# Altium PCB Limit_Switch_RGB_Vertical_v1.0.PcbDoc
Units mm, origin at the board's own origin, x right, y up, seen from the top; angles counter-clockwise.
Board outline 30 x 20.5 mm, 2 copper layers (Top Layer, Bottom Layer), stack 1.569 mm thick; 13 components, 12 nets, 35 pads, 8 vias.
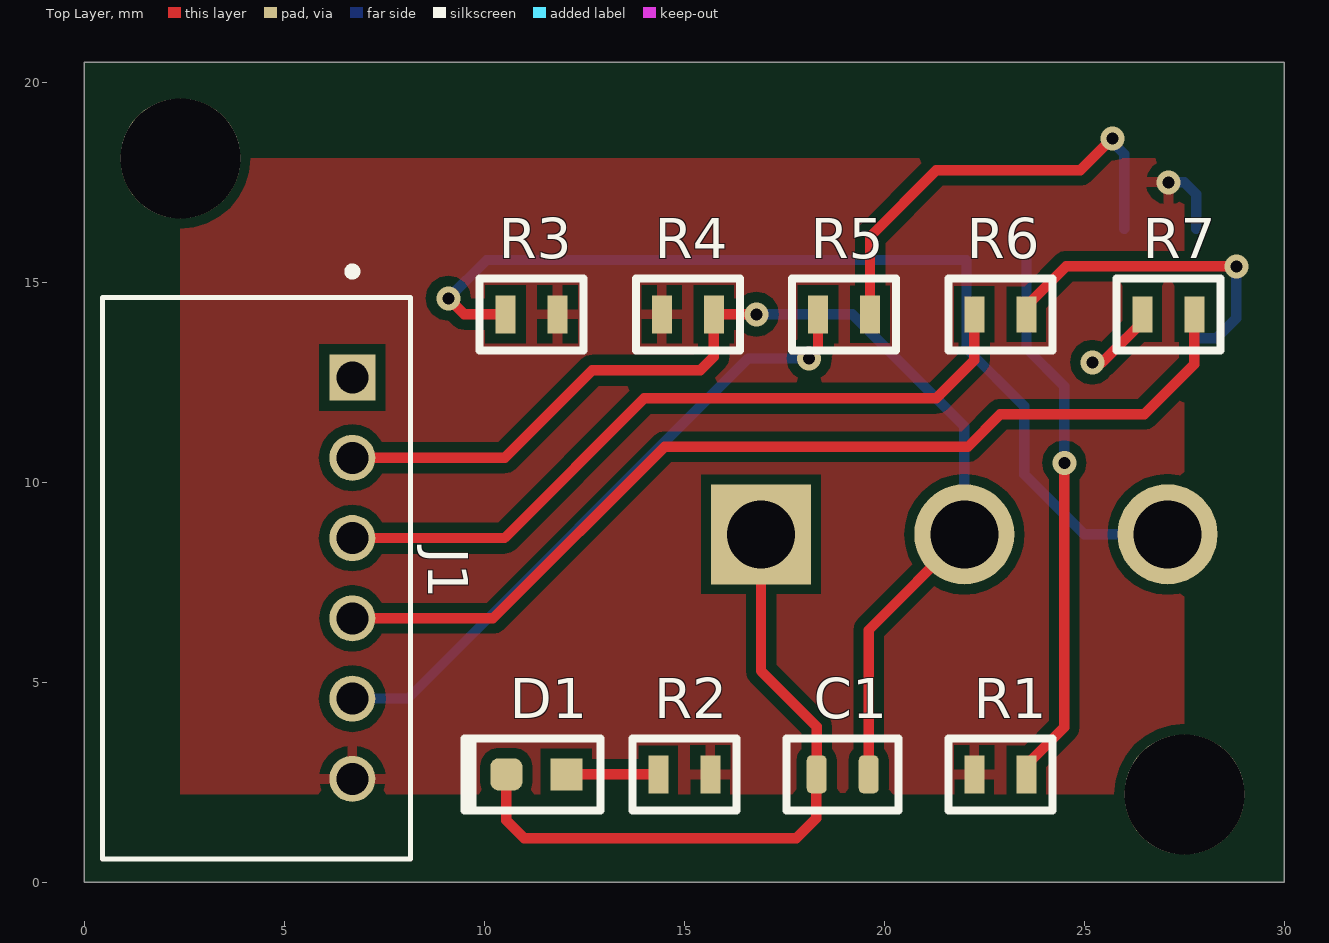
[diagram p0: Top Layer view]
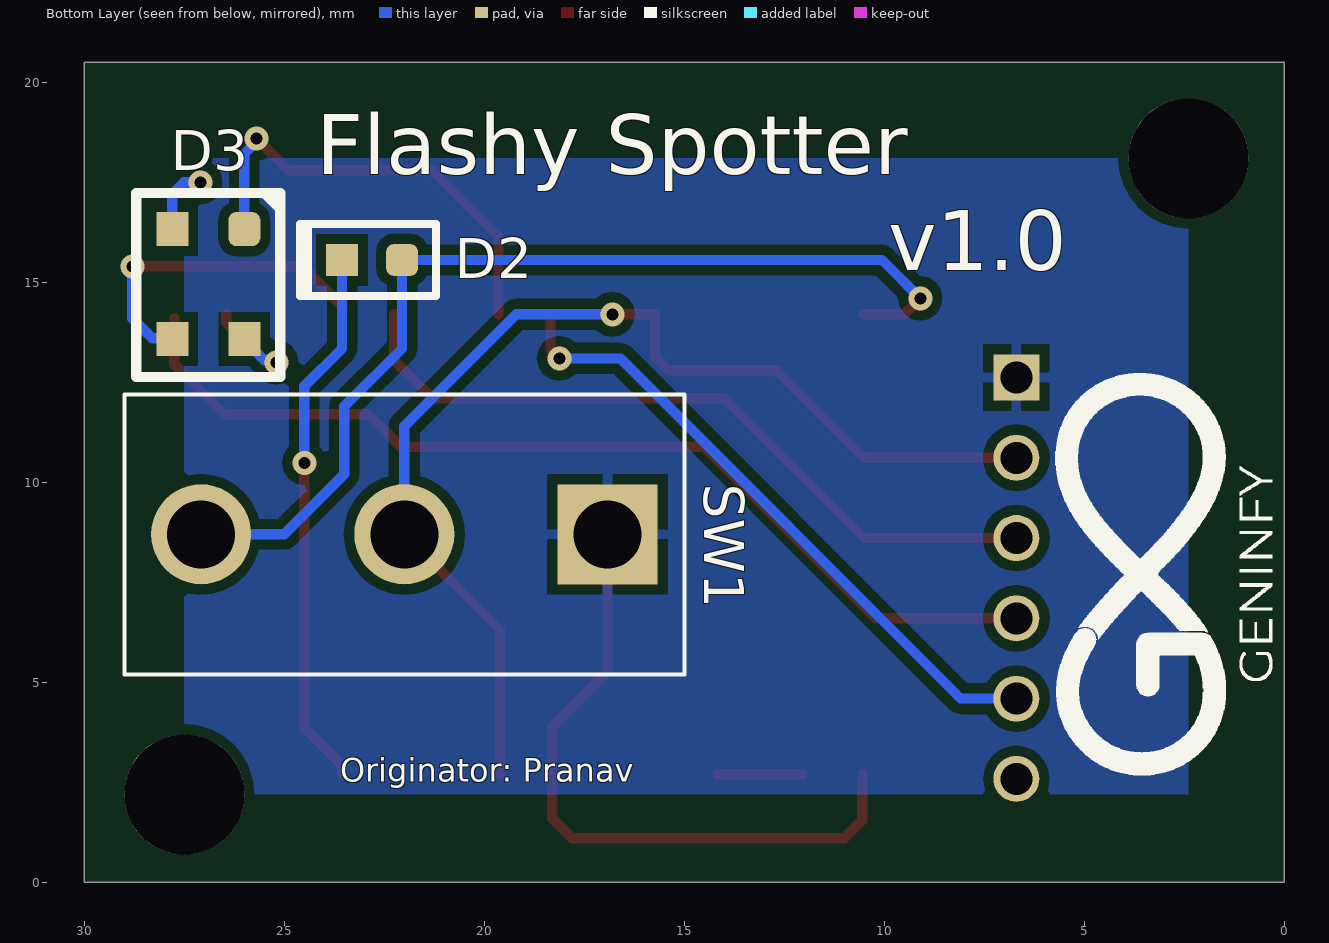
[diagram p1: Bottom Layer view, seen from below]
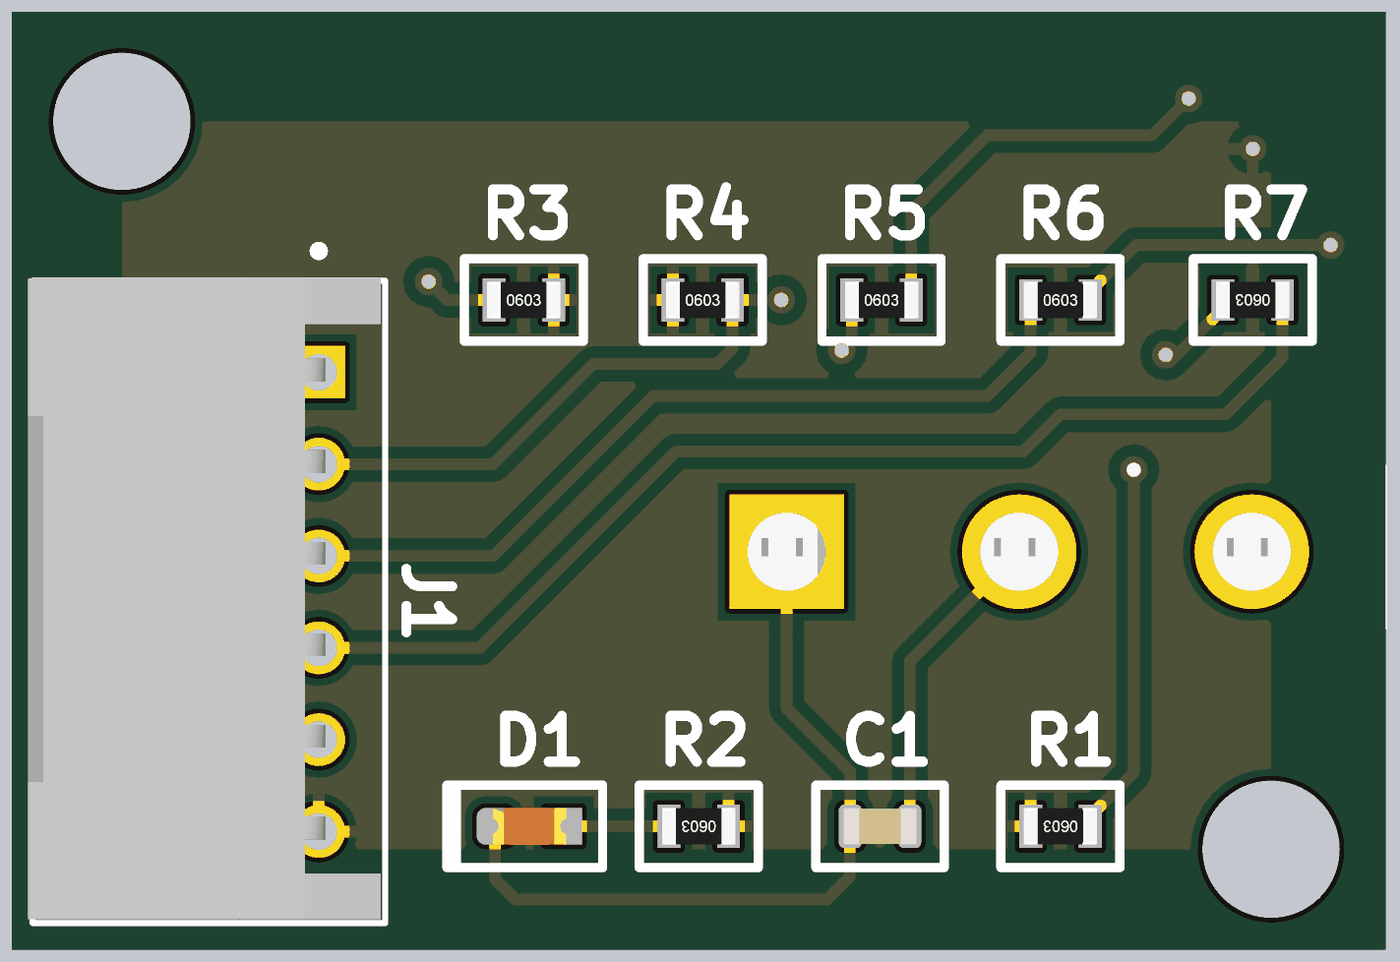
[diagram p2: 3D render of the assembled board from above, using the file's embedded part models]
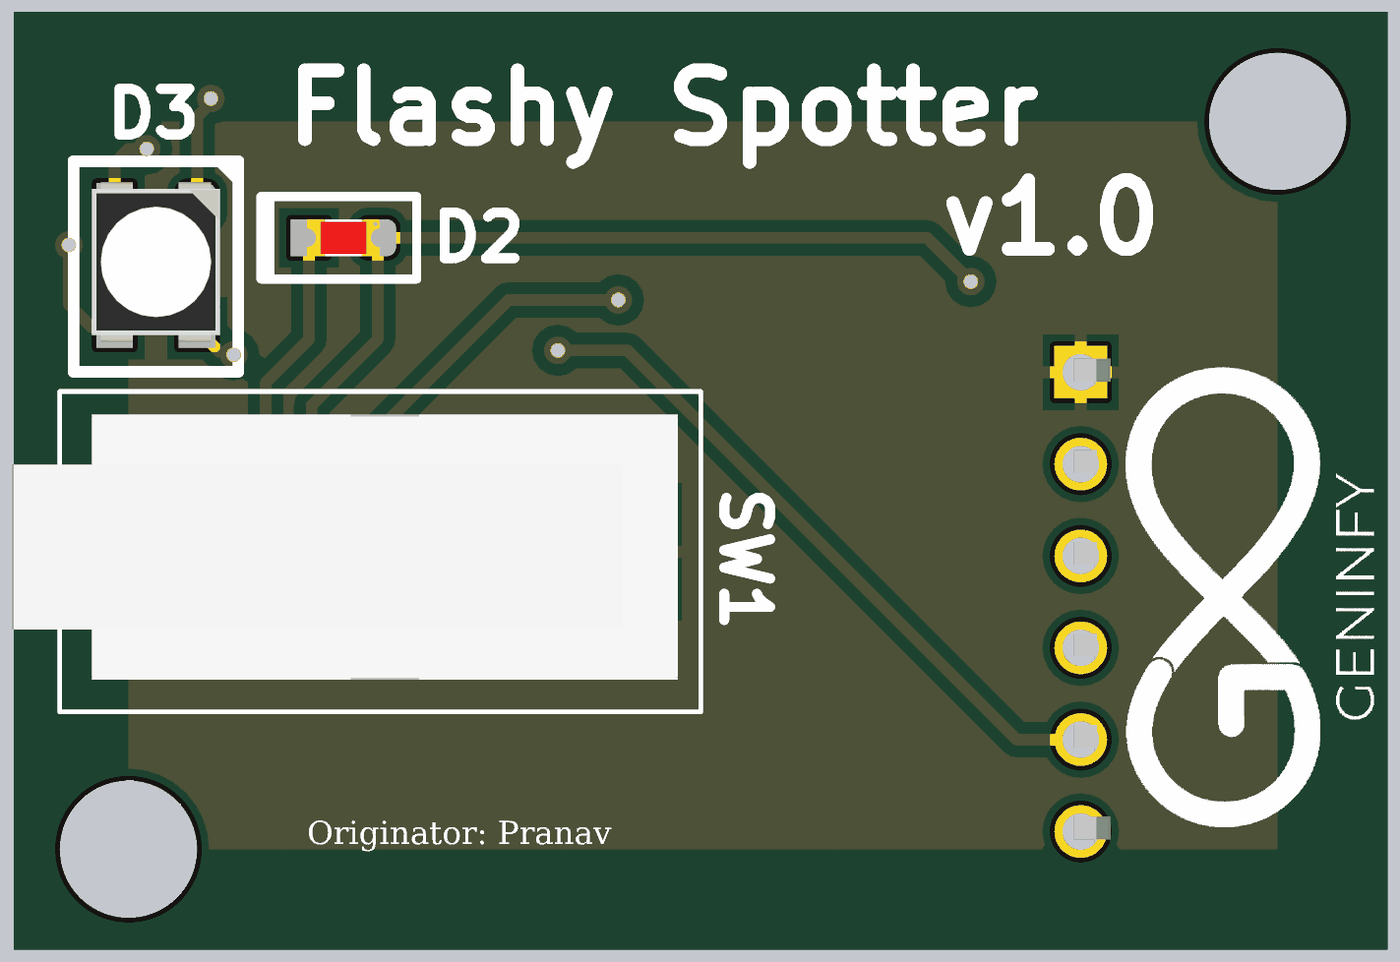
[diagram p3: 3D render of the assembled board from below, using the file's embedded part models]

## Layer stack, top to bottom
Top Solder: solder mask 0.0254, SM-001, Dk 4
Top Layer: signal copper 0.035
Dielectric 1: core 1.4986, Core-043, Dk 4.3
Bottom Layer: signal copper 0.035
Bottom Solder: solder mask 0.0254, SM-001, Dk 4

## Board outline
0,0 30,0 30,20.5 0,20.5

## Design rules (kind name [scope] priority, off if disabled: settings)
Clearance [All] p1: gap=0.254 ignorepadtopadclearanceinfootprint=FALSE except(0: Arc-Hole Track-Hole SMDPad-Hole THPad-Hole Via-Hole Fill-Hole Poly-Hole Region-Hole Text-Hole)
PolygonConnect [All] p1: connectstyle=Relief reliefconductorwidth=0.254 reliefentries=4 polygonreliefangle="90 Angle" airgapwidth=0.254
RoutingVias [All] p1: holewidth=0.711 width=1.27 viastyle="Through Hole" minholewidth=0.711 minwidth=1.27 maxholewidth=0.711 maxwidth=1.27
SolderMaskExpansion [All] p1: expansion=0.102 istentingtop=FALSE
Width [All] p1: maxlimit=0.5 minlimit=0.254 preferedwidth=0.254
30 further rules are at their usual default settings.

## Components (designator, comment, footprint, x,y, rotation, side; value= is the part's Value field where it differs from the comment)
C1 "0.1uF" "0.1UF 0603" 18.96,2.7 r0 top
D1 "LED - Orange" LED0603-Orange 11.3,2.7 r0 top
D2 "LED - Red" "LED RED 0603" 22.806,15.558 r180 bottom
D3 "LED - RGB CA" "LED RGB CA 3528" 26,16.331 r270 bottom
J1 "440055-6" TE_440055-6 6.7,12.62 r270 top
R1 "68R" "68R 0603" 22.9,2.7 r180 top
R2 "68R" "68R 0603" 15,2.7 r180 top
R3 "10k" "10k R0603" 11.179,14.2 r0 top
R4 "10k" "10k R0603" 15.086,14.2 r0 top
R5 "68R" "68R 0603" 18.993,14.2 r0 top
R6 "4.7R" "4.7R 0603" 22.9,14.2 r0 top
R7 "4.7R" "4.7R 0603" 27.1,14.2 r180 top
SW1 "Limit Switch" "LimitSwitch Horizontal" 22,8.7 r270 bottom

## Footprints (in the part's own frame and the unit in brackets; to place one, negate y for a bottom-side part, rotate by r counter-clockwise, add the part's x,y. Pads: shape width x height; smd on the part's side, far side on the other; paste and mask are expansions set on the pad)
"0.1UF 0603" [mm]
  rrect50% 0.5x0.95 smd: 1(-0.65,0) 2(0.65,0)
  silkscreen extent -1.4,-0.9 1.4,0.9, body extent -0.8,-0.4 0.8,0.4, height 0.8
"4.7R 0603" [mm]
  rect 0.5x0.9 smd: 1(-0.65,0) 2(0.65,0)
  silkscreen extent -1.3,-0.9 1.3,0.9, body extent -0.8,-0.4 0.8,0.4, height 0.45
"10k R0603" [mm]
  rect 0.5x0.95 smd: 1(-0.65,0) 2(0.65,0)
  silkscreen extent -1.3,-0.9 1.3,0.9, body extent -0.8,-0.4 0.8,0.4, height 0.45
"68R 0603" [mm]
  rect 0.5x0.95 smd: 1(-0.65,0) 2(0.65,0)
  silkscreen extent -1.3,-0.9 1.3,0.9, body extent -0.8,-0.4 0.8,0.4, height 0.45
LED0603-Orange [mm]
  rrect50% 0.8x0.8 smd: 1(-0.75,0)
  rect 0.8x0.8 smd: 2(0.75,0)
  silkscreen extent -1.8,-0.9 1.6,1, body extent -0.8,-0.4 0.8,0.4, height 0.7
"LED RED 0603" [mm]
  rect 0.8x0.8 smd: 1(-0.75,0)
  rrect50% 0.8x0.8 smd: 2(0.75,0)
  silkscreen extent -1.8,-0.9 1.6,0.9, body extent -0.8,-0.4 0.8,0.4, height 0.61
"LED RGB CA 3528" [mm]
  rrect50% 0.85x0.8 smd: 1(0,0)
  rect 0.85x0.8 smd: 2(0,-1.8) 3(2.75,-1.8) 4(2.75,0)
  silkscreen extent -0.9,-2.7 3.7,0.9, body extent -0.45,-2.3 3.05,0.5, height 1.91
"LimitSwitch Horizontal" [mm]
  rect 2.5x2.5 hole 1.7: 1(0,5.08)
  round 2.5 hole 1.7: 2(0,0) 3(0,-5.08)
  silkscreen extent -3.5,-7 3.5,7, body extent -3,-8.05 2.8,6.5, height 8.31
TE_440055-6 [mm]
  rect 1.15x1.15 hole 0.8: 1(0,0)
  round 1.15 hole 0.8: 2(2.007,0) 3(4.013,0) 4(6.02,0) 5(8.026,0) 6(10.033,0)
  silkscreen extent -2.75,-6.25 12.03,1.45, body extent -2.05,-6.35 11.95,1.35, height 4.96

## Part data
C1: library part C0603C104M4RACTU, "CAP CER 0.1UF 16V X7R 0603", Capacitance=100nF, Case Code (Imperial)=0603, Case Code (Metric)=1608, Dielectric=X7R, Dielectric Material=Ceramic, Manufacturer=KEMET, Max Operating Temperature=125°C, Min Operating Temperature=-55°C, Package Quantity=1, Supplier Part Number 1=399-1099-1-ND, Tolerance=20%, Voltage Rating=16V, Case/Package=0603, Category="Ceramic Capacitors", ComponentLink1Description=https://datasheet.ciiva.com/18102/getdatasheetpartid-66190-18102310.pdf?src-supplier=Verical, ComponentLink1URL=https://datasheet.ciiva.com/18102/getdatasheetpartid-66190-18102310.pdf?src-supplier=Verical, ComponentLink2Description=https://datasheet.ciiva.com/7823/kem-c1002-x7r-smd-7823992.pdf?src-supplier=Element14, ComponentLink2URL=https://datasheet.ciiva.com/7823/kem-c1002-x7r-smd-7823992.pdf?src-supplier=Element14, ComponentLink3Description=https://datasheet.ciiva.com/7823/kem-c1002-x7r-smd-7823993.pdf?src-supplier=Element14, ComponentLink3URL=https://datasheet.ciiva.com/7823/kem-c1002-x7r-smd-7823993.pdf?src-supplier=Element14, ComponentLink4Description=https://datasheet.ciiva.com/14589/70095383-14589450.pdf?src-supplier=Allied+Electronics, ComponentLink4URL=https://datasheet.ciiva.com/14589/70095383-14589450.pdf?src-supplier=Allied+Electronics, ComponentLink5Description=https://datasheet.ciiva.com/18192/getdatasheetpartid-302288-18192716.pdf?src-supplier=Verical, ComponentLink5URL=https://datasheet.ciiva.com/18192/getdatasheetpartid-302288-18192716.pdf?src-supplier=Verical, Depth=0.8mm, Height=0.8mm, Lead Pitch=0.7mm, Length=1.6mm, Manufacturer Part Number=C0603C104M4RACTU, Mount="Surface Mount,PCB", Number of Pins=2, Packaging="Tape and Reel", Pricing 1="1=0.10000, 10=0.03100, 50=0.01720, 100=0.01400, 500=0.01002, 1000=0.00787 (USD)", Radiation Hardening=No, REACH SVHC="No SVHC", RoHS=Yes, Stock 1=114153, Supplier 1=Digi-Key, Termination=SMD/SMT, Thickness=0.034inch, Voltage Rating (DC)=16V, Width=0.031inch
D1: library part LTST-C191KFKT, "LED ORANGE CLEAR SMD", Case Code (Imperial)=0603, Case Code (Metric)=1608, Color=Orange, Forward Current=30mA, Forward Voltage=2V, Lens Color=Colorless, Manufacturer="Vishay Lite-On", Max Operating Temperature=85°C, Min Operating Temperature=-55°C, Package Quantity=1, Power Dissipation=75mW, Reverse Voltage=5V, Supplier Part Number 1=160-1445-1-ND, Test Current=20mA, Case/Package=0603, Category=LEDs, ComponentLink1Description=https://datasheet.ciiva.com/2109/ltst-c191kfkt-2109968.pdf?src-supplier=Digi-Key, ComponentLink1URL=https://datasheet.ciiva.com/2109/ltst-c191kfkt-2109968.pdf?src-supplier=Digi-Key, ComponentLink2Description=https://datasheet.ciiva.com/12400/100-ltst-c191kfkt-39904-12400811.pdf?src-supplier=Mouser, ComponentLink2URL=https://datasheet.ciiva.com/12400/100-ltst-c191kfkt-39904-12400811.pdf?src-supplier=Mouser, ComponentLink3Description=https://datasheet.ciiva.com/11775/0900766b80dc02b0-11775613.pdf?src-supplier=RSComponents, ComponentLink3URL=https://datasheet.ciiva.com/11775/0900766b80dc02b0-11775613.pdf?src-supplier=RSComponents, ComponentLink4Description=https://datasheet.ciiva.com/15201/getdatasheetpartid-631075-15201391.pdf?src-supplier=Verical, ComponentLink4URL=https://datasheet.ciiva.com/15201/getdatasheetpartid-631075-15201391.pdf?src-supplier=Verical, ComponentLink5Description=https://datasheet.ciiva.com/2109/s-110-ltst-c191kfkt-2109969.pdf?src-supplier=Digi-Key, ComponentLink5URL=https://datasheet.ciiva.com/2109/s-110-ltst-c191kfkt-2109969.pdf?src-supplier=Digi-Key, Depth=0.8mm, Dominant Wavelength=605nm, Height=0.55mm, Illumination Color=Orange, Lead Free="Lead Free", Length=1.6mm, Lens Style=Diffused,Colorless,Rectangular, Lens Transparency=Clear, Luminous Intensity=90mcd, Manufacturer Part Number=LTST-C191KFKT, Mount="Surface Mount", Number of Elements=1, Number of LEDs=1, Number of Pins=2, Packaging="Tape and Reel", Power Rating=75mW, Pricing 1="1=0.24000, 10=0.17900, 100=0.08460, 500=0.05640, 1000=0.04418, 2500=0.04324 (USD)", Radiation Hardening=No, RoHS=Yes, Stock 1=92562, Supplier 1=Digi-Key, Viewing Angle=130°, Wavelength=611nm, Width=0.8mm
D2: library part LTST-C191KRKT, "On a Reel of 5000, 2.4 V Red LED 1608 (0603) SMD, Lite-On LTST-C191KRKT", Case Code (Imperial)=0603, Case Code (Metric)=1608, Color=Red, Forward Current=30mA, Forward Voltage=2V, Lens Color=Colorless, Manufacturer="Vishay Lite-On", Max Operating Temperature=85°C, Min Operating Temperature=-55°C, Package Quantity=1, Power Dissipation=75mW, Reverse Voltage=5V, Supplier Part Number 1=160-1447-1-ND, Test Current=20mA, Case/Package=0603, Category=LEDs, ComponentLink1Description=https://datasheet.ciiva.com/11773/0900766b80dc02b2-11773601.pdf?src-supplier=RSComponents, ComponentLink1URL=https://datasheet.ciiva.com/11773/0900766b80dc02b2-11773601.pdf?src-supplier=RSComponents, ComponentLink2Description=https://datasheet.ciiva.com/16212/ltst-c191krkt-16212419.pdf?src-supplier=Future+Electronics, ComponentLink2URL=https://datasheet.ciiva.com/16212/ltst-c191krkt-16212419.pdf?src-supplier=Future+Electronics, ComponentLink3Description=https://datasheet.ciiva.com/15117/getdatasheetpartid-141922-15117737.pdf?src-supplier=Verical, ComponentLink3URL=https://datasheet.ciiva.com/15117/getdatasheetpartid-141922-15117737.pdf?src-supplier=Verical, ComponentLink4Description=https://datasheet.ciiva.com/12400/lite-on-ltst-c191krkt-190135-12400910.pdf?src-supplier=Mouser, ComponentLink4URL=https://datasheet.ciiva.com/12400/lite-on-ltst-c191krkt-190135-12400910.pdf?src-supplier=Mouser, ComponentLink5Description=https://datasheet.ciiva.com/2109/s-110-ltst-c191krkt-2109970.pdf?src-supplier=Digi-Key, ComponentLink5URL=https://datasheet.ciiva.com/2109/s-110-ltst-c191krkt-2109970.pdf?src-supplier=Digi-Key, ComponentLink6Description=https://datasheet.ciiva.com/2109/s-110-ltst-c191krkt-2109971.pdf?src-supplier=Digi-Key, ComponentLink6URL=https://datasheet.ciiva.com/2109/s-110-ltst-c191krkt-2109971.pdf?src-supplier=Digi-Key, ComponentLink7Description=https://datasheet.ciiva.com/2109/s-110-ltst-c191krkt-2109972.pdf?src-supplier=Digi-Key, ComponentLink7URL=https://datasheet.ciiva.com/2109/s-110-ltst-c191krkt-2109972.pdf?src-supplier=Digi-Key, Depth=0.8mm, Dominant Wavelength=631nm, Height=0.55mm, Illumination Color=Red, Lead Free="Lead Free", Length=1.6mm, Lens Style=Clear,Diffused,Colorless,Rectangular, Lens Transparency=Clear, Luminous Intensity=54mcd, Manufacturer Part Number=LTST-C191KRKT, Mount="Surface Mount", Number of Elements=1, Number of LEDs=1, Number of Pins=2, Packaging="Tape and Reel", Power Rating=75mW, Pricing 1="1=0.26000, 10=0.19200, 100=0.09090, 500=0.06060, 1000=0.04747, 2500=0.04646 (USD)", Radiation Hardening=No, RoHS=Yes, Stock 1=497234, Supplier 1=Digi-Key, Viewing Angle=130°, Voltage=2V, Wavelength=639nm, Width=0.8mm
D3: library part CLV1A-FKB-CK1VW1DE1BB7C3C3, "Multicolor LED Red/Green/Blue 624nm/535nm/475nm 50mA/25mA/25mA 4-Pin SMD T/R", Case/Package=PLCC, Color=Blue,Green,Red, Forward Voltage=3.2V, Manufacturer=Cree, Supplier Part Number 1=CLV1A-FKB-CK1VW1DE1BB7C3C3CT-ND, Test Current=20mA, Category=LEDs, ComponentLink1Description=http://www.farnell.com/datasheets/2606189.pdf?src-supplier=Farnell, ComponentLink1URL=http://www.farnell.com/datasheets/2606189.pdf?src-supplier=Farnell, ComponentLink2Description=https://www.cree.com/led-components/media/documents/ds-CLV1A-FKB.pdf?src-supplier=Digi-Key, ComponentLink2URL=https://www.cree.com/led-components/media/documents/ds-CLV1A-FKB.pdf?src-supplier=Digi-Key, Dominant Wavelength=468nm, Element Configuration="Common Anode", Height=2.1mm, Length=3.2mm, Lens Style=Round,Flat, Luminous Intensity=310mcd, Manufacturer Part Number=CLV1A-FKB-CK1VW1DE1BB7C3C3, Mount="Surface Mount", Number of Pins=4, Packaging="Cut Tape", Pricing 1="1=0.42000, 10=0.39500, 100=0.36480, 1000=0.32631 (USD)", RoHS=No, Stock 1=95758, Supplier 1=Digi-Key, Width=2.8mm
J1: Package=None, Availability=Unavailable, MF="{'manufacturer': 'TE Connectivity'}", MP=440055-6, Price=None
R1 R2 R5: library part CRGP0603F68R, "CRGP 0603 68R 1%", Case Code (Imperial)=0603, Case Code (Metric)=1608, Manufacturer="TE Connectivity", Max Operating Temperature=155°C, Max Power Dissipation=250mW, Min Operating Temperature=-55°C, Resistor Type="Thick Film", Supplier Part Number 1=A130402CT-ND, Temperature Coefficient=200ppm/°C, Tolerance=1%, Case/Package=0603, Category="Chip SMD Resistors", ComponentLink1Description=https://www.te.com/commerce/DocumentDelivery/DDEController?Action=srchrtrv&amp;DocNm=9-1773463-9&amp;DocType=DS&amp;DocLang=English&src-supplier=Digi-Key, ComponentLink1URL=https://www.te.com/commerce/DocumentDelivery/DDEController?Action=srchrtrv&amp;DocNm=9-1773463-9&amp;DocType=DS&amp;DocLang=English&src-supplier=Digi-Key, Manufacturer Part Number=CRGP0603F68R, Number of Terminations=2, Packaging="Tape and Reel", Pricing 1="1=0.14000, 10=0.11400, 100=0.04470, 1000=0.01870, 2500=0.01714 (USD)", Resistance=68R, RoHS=No, Stock 1=49308, Supplier 1=Digi-Key
R3 R4: library part CRG0603F10K/10, "RES 10.0K OHM 1/10W 1% 0603", Case Code (Imperial)=0603, Manufacturer="TE Connectivity", Max Operating Temperature=125°C, Max Power Dissipation=100mW, Min Operating Temperature=-55°C, Number of Resistors=1, Package Quantity=10000, Resistance=10kR, Resistor Type="Thick Film", Supplier Part Number 1=A121523CT-ND, Temperature Coefficient=100ppm/°C, Tolerance=1%, Voltage Rating=50V, Case/Package=0603, Category="Chip SMD Resistors", ComponentLink1Description=https://datasheet.ciiva.com/2530/eng-cd-1622829-ba-2530062.pdf?src-supplier=Digi-Key, ComponentLink1URL=https://datasheet.ciiva.com/2530/eng-cd-1622829-ba-2530062.pdf?src-supplier=Digi-Key, Depth=0.8mm, ELV=Compliant, Height=0.022inch, Length=1.6mm, Manufacturer Part Number=CRG0603F10K/10, Military Standard=Not, Mount="Surface Mount", Number of Terminations=2, Packaging="Tape and Reel", Power Rating=100mW, Pricing 1="1=0.10000, 10=0.03100, 100=0.01270, 1000=0.00570, 2500=0.00494, 5000=0.00409 (USD)", Radiation Hardening=No, RoHS=Yes, Stock 1=172089, Supplier 1=Digi-Key, Termination=Solder, Weight=7.1E-05oz, Width=0.8mm
R6 R7: library part CRGCQ0603J4R7, Manufacturer="TE Connectivity", Supplier Part Number 1=A130077CT-ND, Category="Chip SMD Resistors", Manufacturer Part Number=CRGCQ0603J4R7, Pricing 1="1=0.10000, 10=0.01900, 100=0.00780, 1000=0.00352, 2500=0.00306 (USD)", RoHS=No, Stock 1=47068, Supplier 1=Digi-Key
SW1: library part SS0750301F040P1A, "Switch Snap Action N.O./N.C. SPDT Straight Lever 3A 250VAC 0.39N Thru-Hole PC Pins", Current Rating=3A, Manufacturer=E-Switch, Max Operating Temperature=75°C, Min Operating Temperature=-25°C, Operating Force=0.4N, Operating Position=0.345inch, Package Quantity=120, Supplier Part Number 1=EG4924-ND, Voltage Rating (AC)=125V, Category="Snap Action / Limit Switches", ComponentLink1Description=https://datasheet.ciiva.com/2897/q971003c-2897801.pdf?src-supplier=Digi-Key, ComponentLink1URL=https://datasheet.ciiva.com/2897/q971003c-2897801.pdf?src-supplier=Digi-Key, Electrical Life=100000Cycles, Manufacturer Part Number=SS0750301F040P1A, Mechanical Life=1000000Cycles, Mount="Through Hole", Packaging=Bulk, Pretravel=0.063inch, Pricing 1="1=1.09000, 10=1.02800, 25=0.98640, 50=0.94540, 100=0.90420, 250=0.71924, 500=0.65760, 1000=0.63705, 5000=0.57540 (USD)", RoHS=Yes, Stock 1=1941, Supplier 1=Digi-Key, Switch Function=On-Mom, Termination="PC Pin", Throw Configuration=SPDT

## Free pads (board coordinates)
  round 3 hole 3 unplated: ""(2.4,18.1) ""(27.5,2.2)

## Via types
v1: diameter 0.6, hole 0.3, Top Layer to Bottom Layer, tented both sides, 8 vias

## Nets (pads, with @x,y where several pads share a name; then routed paths per layer and width w, separated by ;. In a path a pad name is that pad's centre, name@x,y a point inside that pad or via, vN(x,y) a via of type N, cw(c..) or ccw(c..) an arc to the next point about the centre after c; other vN are vias at no path point)
+3V3: D3.2 J1.6 R1.2 R2.1 R3.2 R4.1 | length 1.7
  Bottom Layer w0.254: v1(27.1,17.5) 27.5,17.5 27.8,17.2 D3.2
BLUE: J1.3 R6.1 | length 18.5
  Top Layer w0.254: J1.3 10.507,8.607 14,12.1 21.3,12.1 22.25,13.05 R6.1
GND: C1.1 D1.1 J1.1 SW1.1 | length 17
  Top Layer w0.254: D1.1 10.55,1.55 11,1.1 17.8,1.1 18.3,1.6 18.3,2.69 C1.1 18.31,3.89 16.92,5.28 SW1.1
GREEN: J1.4 R7.1 | length 24.8
  Top Layer w0.254: J1.4 10.218,6.6 14.509,10.891 22.091,10.891 22.9,11.7 26.5,11.7 27.75,12.95 R7.1@27.75,14.1
LM_SW: C1.2 J1.2 R4.2 SW1.2 | length 28.3
  Top Layer w0.254: J1.2 10.513,10.613 12.7,12.8 15.4,12.8 15.736,13.136 R4.2 v1(16.8,14.2) ; C1.2 19.61,6.31 SW1.2
  Bottom Layer w0.254: v1(16.8,14.2) 19.2,14.2 22,11.4 SW1.2
NC/ON: D2.2 R3.1 SW1.3 | length 25.1
  Top Layer w0.254: v1(9.1,14.6) 9.5,14.2 R3.1
  Bottom Layer w0.254: v1(9.1,14.6) 10.058,15.558 D2.2 22.056,13.344 23.5,11.9 23.5,10.2 25,8.7 SW1.3
NetD1_2: D1.2 R2.2 | length 2.1
  Top Layer w0.254: D1.2 R2.2@14.169,2.7
NetD2_1: D2.1 R1.1 | length 13.6
  Top Layer w0.254: R1.1 23.55,2.925 24.5,3.875 v1(24.5,10.488)
  Bottom Layer w0.254: D2.1 23.556,13.344 24.5,12.4 v1(24.5,10.488)
NetD3_1: D3.1 R5.2 | length 11.4
  Top Layer w0.254: R5.2 19.643,16.143 21.3,17.8 24.9,17.8 v1(25.7,18.6)
  Bottom Layer w0.254: v1(25.7,18.6) 25.7,18.506 26,18.206 D3.1
NetD3_3: D3.3 R6.2 | length 8.4
  Top Layer w0.254: R6.2 23.55,14.4 24.55,15.4 v1(28.8,15.4)
  Bottom Layer w0.254: D3.3 27.819,13.6 28.3,13.6 28.8,14.1 v1(28.8,15.4)
NetD3_4: D3.4 R7.2 | length 2.9
  Top Layer w0.254: v1(25.2,13) 25.45,13 26.45,14 R7.2
  Bottom Layer w0.254: v1(25.2,13) 25.266,13.066 25.51,13.066 26,13.556 D3.4
RED: J1.5 R5.1 | length 16.1
  Top Layer w0.254: v1(18.122,13.098) 18.343,13.32 R5.1
  Bottom Layer w0.254: J1.5 8.094,4.594 16.598,13.098 v1(18.122,13.098)

## Polygon pours and split planes (outlines as drawn)
+3V3 on Top Layer "+3V3_L01_P001" (solid, pour order 1): 2.4,18.1 2.4,2.2 27.5,2.2 27.5,18.1
GND on Bottom Layer "GND_L02_P000" (solid, pour order 0): 2.4,18.1 2.4,2.2 27.5,2.2 27.5,18.1

## Silkscreen, mask and mechanical layers (free items; w line width, h text height)
Bottom Overlay:
  drawing of 9 lines, arcs and shapes, not listed
  text "Flashy Spotter" at 24.2,17.7 h1.5
  text "v1.0" at 9.9,15.3 h1.5
  text "Originator: Pranav" at 23.6,2.311 h1
Mechanical 2:
  lines w0.1: 0,0 0,20.4 30,20.4 30,0 0,0